# Altium PCB io9.PcbDoc
Units mm, origin at the board's own origin, x right, y up, seen from the top; angles counter-clockwise.
Board outline 240 x 140.7 mm, 2 copper layers (Top Layer, Bottom Layer); 27 components, 84 nets, 368 pads, 225 vias.
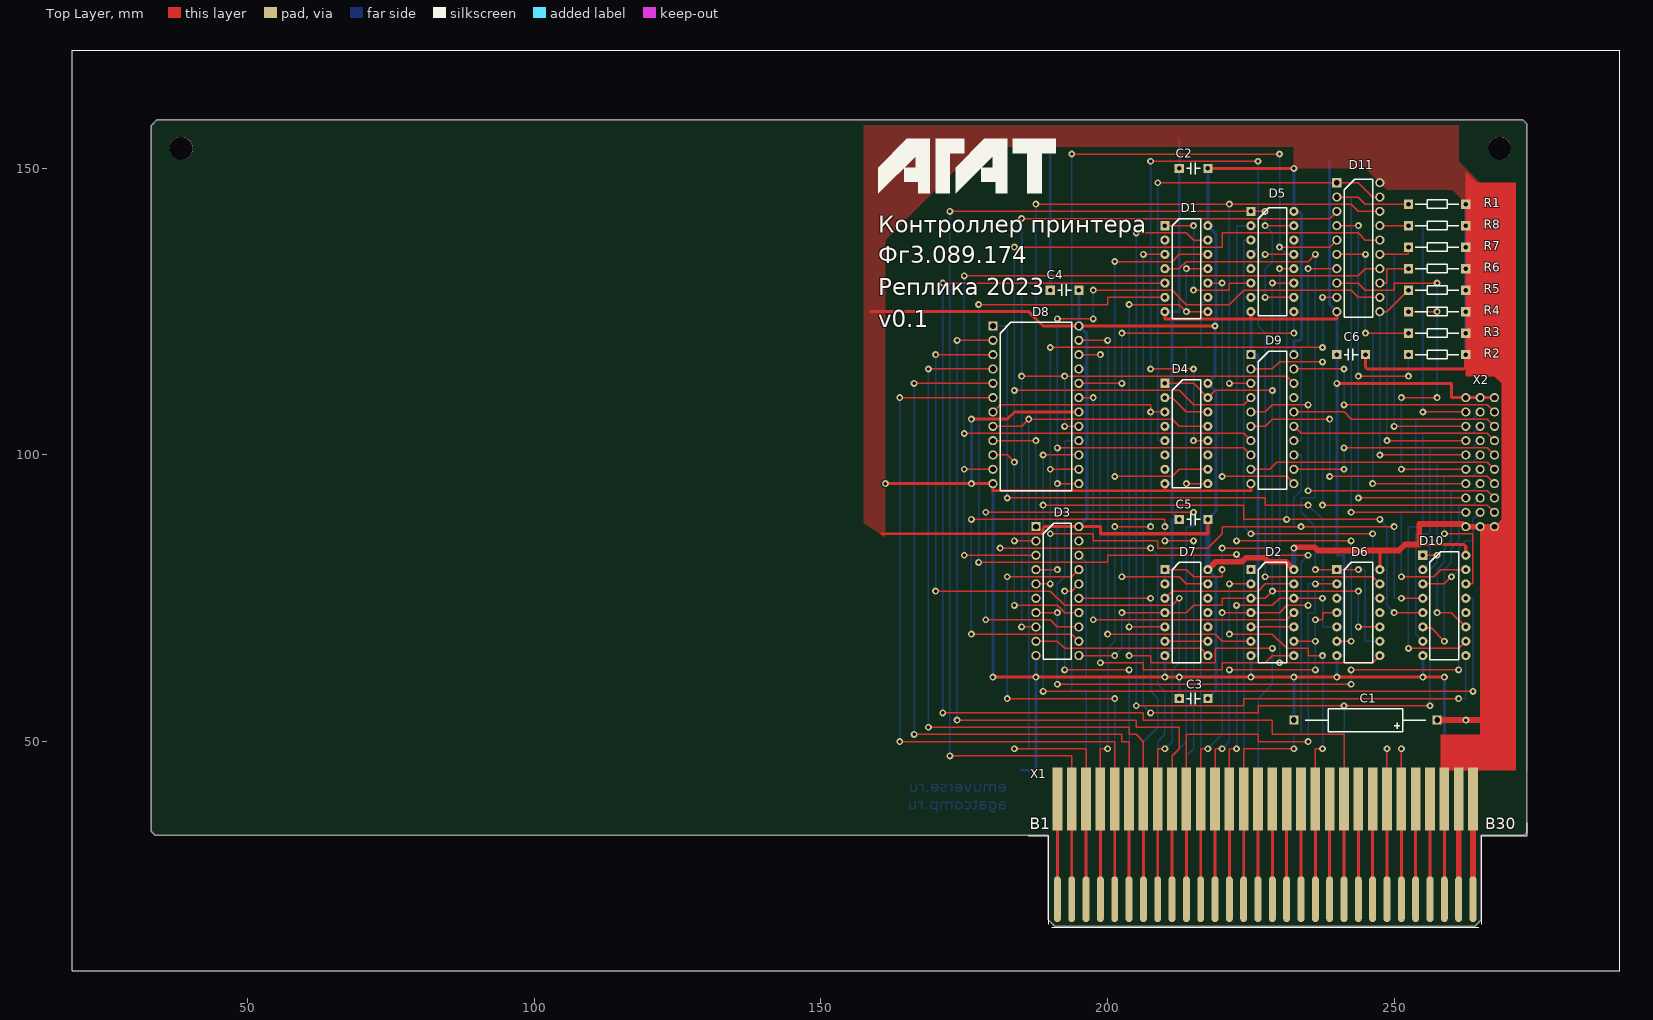
[diagram p0: Top Layer view]
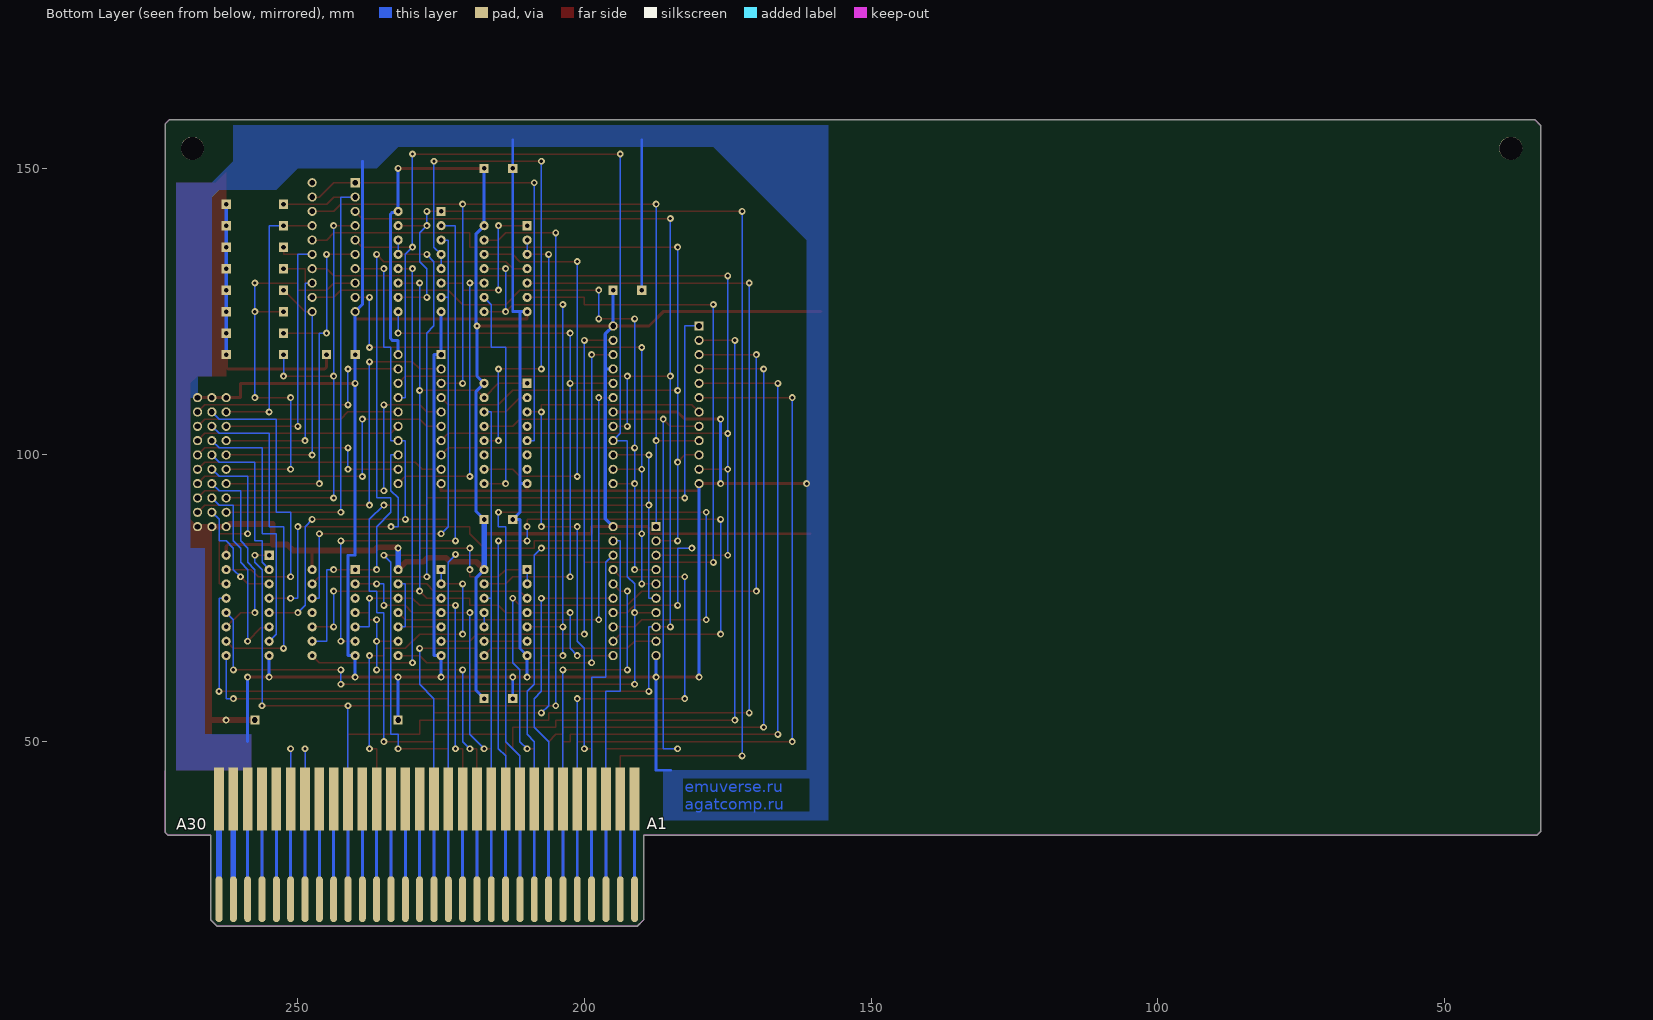
[diagram p1: Bottom Layer view, seen from below]

## Layer stack, top to bottom
Top Solder: solder mask 0.0102, Solder Resist, Dk 3.5
Top Layer: signal copper 0.0356
Dielectric 1: dielectric 0.32, FR-4, Dk 4.8
Bottom Layer: signal copper 0.0356
Bottom Solder: solder mask 0.0102, Solder Resist, Dk 3.5

## Board outline
189.7,18.9 189.7,33.6 189.675,33.625 33.875,33.625 33.15,34.35 33.15,157.45 34.2,158.5 272.4,158.5 273.15,157.75 273.15,34.15 272.625,33.625 265.2,33.625 265.2,18.9 264.1,17.8 190.8,17.8

## Design rules (kind name [scope] priority, off if disabled: settings)
Clearance [All] p1: gap=0.254 ignorepadtopadclearanceinfootprint=FALSE except(0: Arc-Hole Track-Hole SMDPad-Hole THPad-Hole Via-Hole Fill-Hole Poly-Hole Region-Hole Text-Hole; 0.2: Arc-Arc Arc-Track Arc-SMDPad Arc-THPad Arc-Via Arc-Fill Arc-Poly Arc-Region Arc-Text Track-Track Track-SMDPad Track-THPad Track-Via Track-Fill Track-Poly Track-Region Track-Text)
HoleSize [All] p1: absolutevalues=TRUE maxlimit=5 minlimit=0.025 maxpercent=80.000 minpercent=20.000
PolygonConnect [All] p1: connectstyle=Direct reliefconductorwidth=0.254 reliefentries=4 polygonreliefangle="90 Angle" airgapwidth=0.254
RoutingVias [All] p1: holewidth=0.711 width=1.27 viastyle="Through Hole" minholewidth=0.711 minwidth=1.27 maxholewidth=0.711 maxwidth=1.27
SolderMaskExpansion [All] p1: expansion=0.102 istentingtop=FALSE
Width [All] p1: maxlimit=2 minlimit=0.2 preferedwidth=0.25
29 further rules are at their usual default settings.

## Components (designator, comment, footprint, x,y, rotation, side; value= is the part's Value field where it differs from the comment)
C1 "0,1" CP30 257.5,53.75 r270 top
C2 "0,1 мкф" C5 212.5,150 r90 top
C3 "0,1 мкф" C5 212.5,57.5 r90 top
C4 "0,1 мкф" C5 190,128.75 r90 top
C5 "0,1 мкф" C5 212.5,88.75 r90 top
C6 "0,1 мкф" C5 240,117.5 r90 top
D1 "К555ЛЕ1" 201.14 210,140 r0 top
D2 "К555ЛЛ1" 201.14 225,80 r0 top
D3 "КР580ВА86" 2140.20 187.5,87.5 r0 top
D4 "К555ИД4" 201.16 210,112.5 r0 top
D5 "КР559ИП7" 201.16 225,142.5 r0 top
D6 "К555ЛИ6" 201.14 240,80 r0 top
D7 "К555ЛА3" 201.14 210,80 r0 top
D8 "К573РФ2" "2120.24 socket" 180,122.5 r0 top
D9 "К555ИР27" 201.20 225,117.5 r0 top
D10 "К555ТМ8" 201.16 255,82.5 r0 top
D11 "К555АП5" 201.20 240,147.5 r0 top
R1 "1K" R10 252.5,143.75 r90 top
R2 "1K" R10 252.5,117.5 r90 top
R3 "1K" R10 252.5,121.25 r90 top
R4 "1K" R10 252.5,125 r90 top
R5 "1K" R10 252.5,128.75 r90 top
R6 "1K" R10 252.5,132.5 r90 top
R7 "1K" R10 252.5,136.25 r90 top
R8 "1K" R10 252.5,140 r90 top
X1 "Agat-Ext-io9" AGAT_EXT 31.896,17.33 r0 top
X2 "IO9_OUT" СНП34-300/27х9,4Р-22-Р 267.5,87.5 r0 top

## Footprints (in the part's own frame and the unit in brackets; to place one, negate y for a bottom-side part, rotate by r counter-clockwise, add the part's x,y. Pads: shape width x height; smd on the part's side, far side on the other; paste and mask are expansions set on the pad)
201.14 [mm]
  rect 1.6x1.6 hole 0.8: 1(0,0)
  round 1.6 hole 0.8: 2(0,-2.5) 3(0,-5) 4(0,-7.5) 5(0,-10) 6(0,-12.5) 7(0,-15) 8(7.5,-15) 9(7.5,-12.5) 10(7.5,-10) 11(7.5,-7.5) 12(7.5,-5) 13(7.5,-2.5) 14(7.5,0)
  silkscreen extent 1.25,-16.25 6.25,1.25, body extent -0.13,-16.55 7.63,1.55, height 4.5
201.16 [mm]
  rect 1.6x1.6 hole 0.8: 1(0,0)
  round 1.6 hole 0.8: 2(0,-2.5) 3(0,-5) 4(0,-7.5) 5(0,-10) 6(0,-12.5) 7(0,-15) 8(0,-17.5) 9(7.5,-17.5) 10(7.5,-15) 11(7.5,-12.5) 12(7.5,-10) 13(7.5,-7.5) 14(7.5,-5) 15(7.5,-2.5) 16(7.5,0)
  silkscreen extent 1.25,-18.25 6.25,0.63, body extent -0.13,-19.05 7.63,1.55, height 4.5
201.20 [mm]
  rect 1.6x1.6 hole 1: 1(0,0)
  round 1.6 hole 1: 2(0,-2.5) 3(0,-5) 4(0,-7.5) 5(0,-10) 6(0,-12.5) 7(0,-15) 8(0,-17.5) 9(0,-20) 10(0,-22.5) 11(7.5,-22.5) 12(7.5,-20) 13(7.5,-17.5) 14(7.5,-15) 15(7.5,-12.5) 16(7.5,-10) 17(7.5,-7.5) 18(7.5,-5) 19(7.5,-2.5) 20(7.5,0)
  silkscreen extent 1.25,-23.5 6.25,0.63, body extent 0.02,-24.2 7.78,1.4, height 4.5
"2120.24 socket" [mm]
  rect 1.6x1.6 hole 1: 1(0,0)
  round 1.6 hole 1: 2(0,-2.5) 3(0,-5) 4(0,-7.5) 5(0,-10) 6(0,-12.5) 7(0,-15) 8(0,-17.5) 9(0,-20) 10(0,-22.5) 11(0,-25) 12(0,-27.5) 13(15,-27.5) 14(15,-25) 15(15,-22.5) 16(15,-20) 17(15,-17.5) 18(15,-15) 19(15,-12.5) 20(15,-10) 21(15,-7.5) 22(15,-5) 23(15,-2.5) 24(15,0)
  silkscreen extent 1.25,-28.75 13.75,0.63, body extent -1.39,-28.98 16.39,1.5, height 8.2
2140.20 [mm]
  rect 1.6x1.6 hole 1: 1(0,0)
  round 1.6 hole 1: 2(0,-2.5) 3(0,-5) 4(0,-7.5) 5(0,-10) 6(0,-12.5) 7(0,-15) 8(0,-17.5) 9(0,-20) 10(0,-22.5) 11(7.5,-22.5) 12(7.5,-20) 13(7.5,-17.5) 14(7.5,-15) 15(7.5,-12.5) 16(7.5,-10) 17(7.5,-7.5) 18(7.5,-5) 19(7.5,-2.5) 20(7.5,0)
  silkscreen extent 1.25,-23.1 6.2,0.63, body extent -0.1,-23.5 7.77,1.1, height 4.36
AGAT_EXT [mm]
  rrect100% 1.2x8 smd far side: A1(159.354,5.17) A2(161.854,5.17) A3(164.354,5.17) A4(166.854,5.17) A5(169.354,5.17) A6(171.854,5.17) A7(174.354,5.17) A8(176.854,5.17) A9(179.354,5.17) A10(181.854,5.17) A11(184.354,5.17) A12(186.854,5.17) A13(189.354,5.17) A14(191.854,5.17) A15(194.354,5.17) A16(196.854,5.17) A17(199.354,5.17) A18(201.854,5.17) A19(204.354,5.17) A20(206.854,5.17) A21(209.354,5.17) A22(211.854,5.17) A23(214.354,5.17) A24(216.854,5.17) A25(219.354,5.17) A26(221.854,5.17) A27(224.354,5.17) A28(226.854,5.17) A29(229.354,5.17) A30(231.854,5.17)
  rect 1.7x11 smd far side: A1(159.354,22.67) A2(161.854,22.67) A3(164.354,22.67) A4(166.854,22.67) A5(169.354,22.67) A6(171.854,22.67) A7(174.354,22.67) A8(176.854,22.67) A9(179.354,22.67) A10(181.854,22.67) A11(184.354,22.67) A12(186.854,22.67) A13(189.354,22.67) A14(191.854,22.67) A15(194.354,22.67) A16(196.854,22.67) A17(199.354,22.67) A18(201.854,22.67) A19(204.354,22.67) A20(206.854,22.67) A21(209.354,22.67) A22(211.854,22.67) A23(214.354,22.67) A24(216.854,22.67) A25(219.354,22.67) A26(221.854,22.67) A27(224.354,22.67) A28(226.854,22.67) A29(229.354,22.67) A30(231.854,22.67)
  rrect100% 1.2x8 smd: B1(159.354,5.17) B2(161.854,5.17) B3(164.354,5.17) B4(166.854,5.17) B5(169.354,5.17) B6(171.854,5.17) B7(174.354,5.17) B8(176.854,5.17) B9(179.354,5.17) B10(181.854,5.17) B11(184.354,5.17) B12(186.854,5.17) B13(189.354,5.17) B14(191.854,5.17) B15(194.354,5.17) B16(196.854,5.17) B17(199.354,5.17) B18(201.854,5.17) B19(204.354,5.17) B20(206.854,5.17) B21(209.354,5.17) B22(211.854,5.17) B23(214.354,5.17) B24(216.854,5.17) B25(219.354,5.17) B26(221.854,5.17) B27(224.354,5.17) B28(226.854,5.17) B29(229.354,5.17) B30(231.854,5.17)
  rect 1.7x11 smd: B1(159.354,22.67) B2(161.854,22.67) B3(164.354,22.67) B4(166.854,22.67) B5(169.354,22.67) B6(171.854,22.67) B7(174.354,22.67) B8(176.854,22.67) B9(179.354,22.67) B10(181.854,22.67) B11(184.354,22.67) B12(186.854,22.67) B13(189.354,22.67) B14(191.854,22.67) B15(194.354,22.67) B16(196.854,22.67) B17(199.354,22.67) B18(201.854,22.67) B19(204.354,22.67) B20(206.854,22.67) B21(209.354,22.67) B22(211.854,22.67) B23(214.354,22.67) B24(216.854,22.67) B25(219.354,22.67) B26(221.854,22.67) B27(224.354,22.67) B28(226.854,22.67) B29(229.354,22.67) B30(231.854,22.67)
  Top Layer lines w0.5: 159.354,8.97 159.354,18 ; 161.854,8.77 161.854,18 ; 164.354,8.87 164.354,18 ; 166.5,18 166.854,17.646 166.854,8.77 ; 169.354,8.77 169.354,18 ; 171.854,8.97 171.854,17.5 ; 174.354,8.87 174.354,17.5 ; 176.854,8.77 176.854,17.5 ; 179.354,9.27 179.354,17.5 ; 181.854,8.97 181.854,17.5 ; 184.354,9.07 184.354,17.5 ; 186.854,8.77 186.854,17.5 ; 189.354,8.77 189.354,17.5 ; 191.854,8.77 191.854,17.5 ; 194.354,8.77 194.354,17.5 ; 196.854,8.77 196.854,17.5 ; 199.354,8.77 199.354,17.5 ; 201.854,8.77 201.854,17.5 ; 204.354,8.77 204.354,17.5 ; 206.854,8.77 206.854,17.5 ; 209.354,8.77 209.354,17.5 ; 211.854,8.87 211.854,17.5 ; 214.354,8.77 214.354,17.5 ; 216.854,8.97 216.854,17.5 ; 219.354,8.77 219.354,17.5 ; 221.854,8.77 221.854,17.5 ; 224.354,8.87 224.354,17.5 ; 226.854,8.77 226.854,17.5
  Top Layer lines w1: 229.354,8.77 229.354,17.5 ; 231.854,8.77 231.854,17.5
  Bottom Layer lines w0.5: 159.354,8.97 159.354,17.5 ; 161.854,8.77 161.854,17.5 ; 164.354,8.97 164.354,18 ; 166.854,8.77 166.854,17.5 ; 169.354,8.77 169.354,17.5 ; 171.854,8.87 171.854,18 ; 174.354,8.97 174.354,17.5 ; 176.854,8.77 176.854,17.5 ; 179.354,9.07 179.354,17.5 ; 181.854,9.17 181.854,17.5 ; 184.354,8.87 184.354,18 ; 186.854,8.77 186.854,17.5 ; 189.354,8.77 189.354,18 ; 191.854,8.77 191.854,17.5 ; 194.354,8.77 194.354,17.5 ; 196.854,8.77 196.854,18 ; 199.354,8.77 199.354,18 ; 201.854,8.77 201.854,18 ; 204.354,8.77 204.354,17.5 ; 206.854,8.77 206.854,17.5 ; 209.354,8.77 209.354,17.5 ; 211.854,8.87 211.854,18 ; 214.354,8.77 214.354,17.5 ; 216.854,8.87 216.854,17.5 ; 219.354,8.77 219.354,17.5 ; 221.854,8.77 221.854,17.5 ; 224.354,8.87 224.354,18 ; 226.854,8.77 226.854,17.5
  Bottom Layer lines w1: 229.354,8.77 229.354,18 ; 231.854,8.77 231.854,17.5
  silkscreen extent 154.27,0.27 241.3,18.5
C5 [mm]
  rect 1.6x1.6 hole 0.8: 1(0,0) 2(0,-5)
  silkscreen extent -1,-3.7 1,-1.3, body extent -1.05,-5.54 1.05,0.46, height 8.1
CP30 [mm]
  rect 1.6x1.6 hole 1: 1(0,0) 2(0,-25)
  silkscreen extent -2,-23 2,-2, body extent -2.56,-25.42 2.56,0.42, height 5.86
R10 [mm]
  rect 1.6x1.6 hole 0.8: 1(0,0) 2(0,-10)
  silkscreen extent -0.75,-8.8 0.75,-1.2, body extent -1.2,-10.38 1.18,0.38, height 2.41
СНП34-300/27х9,4Р-22-Р [mm]
  round 1.6 hole 1: A1(0,0) A2(0,2.5) A3(0,5) A4(0,7.5) A5(0,10) A6(0,12.5) A7(0,15) A8(0,17.5) A9(0,20) A10(0,22.5) B1(-2.5,0) B2(-2.5,2.5) B3(-2.5,5) B4(-2.5,7.5) B5(-2.5,10) B6(-2.5,12.5) B7(-2.5,15) B8(-2.5,17.5) B9(-2.5,20) B10(-2.5,22.5) C1(-5,0) C2(-5,2.5) C3(-5,5) C4(-5,7.5) C5(-5,10) C6(-5,12.5) C7(-5,15) C8(-5,17.5) C9(-5,20) C10(-5,22.5)
  body extent -5.15,-2.3 14,24.7, height 9.7

## Part data
C1: library part К53-14, "К53-14"
C2 C3 C4 C5 C6: library part К10-17, "К10-17"
D1 D2 D5 D6: ManufacturerPartNumber=К555ЛА3
R1 R2 R3 R4 R5 R6 R7 R8: library part С2-23, "Резистор"
D4: ManufacturerPartNumber=К555ИД4
D7: ManufacturerPartNumber=К555ЛА3
D10: ManufacturerPartNumber=К555ТМ8

## Free pads (board coordinates)
  round 4 hole 4 unplated: 0(38.4,153.5) 0(268.4,153.5)

## Via types
v1: diameter 1.2, hole 0.6, Top Layer to Bottom Layer, 225 vias

## Nets (pads, with @x,y where several pads share a name; then routed paths per layer and width w, separated by ;. In a path a pad name is that pad's centre, name@x,y a point inside that pad or via, vN(x,y) a via of type N, cw(c..) or ccw(c..) an arc to the next point about the centre after c; other vN are vias at no path point)
2M: D1.8 D1.11 D7.5 X1.A15 | length 144.1
  Top Layer w0.25: v1(203.75,65) 207.5,65 207.5,63.75 218.75,63.75 218.75,66.25 v1(228.75,66.25) ; v1(203.75,70) D7.5 ; v1(203.75,126.25) 212.5,126.25 v1(213.75,125) D1.8 ; v1(213.75,132.5) D1.11
  Bottom Layer w0.25: v1(203.75,65) v1(203.75,126.25) ; v1(213.75,125) v1(213.75,132.5) ; X1.A15@226.25,45 226.25,57.5 228.75,60 v1(228.75,66.25)
+5В: C1.1 C2.2 C3.2 C4.2 C5.2 C6.2 D1.14 D2.14 D3.20 D4.16 D5.16 D6.14 D7.14 D8.21 D8.24 D9.20 D10.16 D11.20 R1.2 R2.2 R3.2 R4.2 R5.2 R6.2 R7.2 R8.2 X1.B28 X1.B29 X1.B30 X2.A1 X2.B1 X2.C1 | length 442.1
  Top Layer w0.5: 160.625,86.25 188.486,86.25 188.75,86.514 188.75,87.207 189.043,87.5 D3.20
  Top Layer w0.55: 158.75,125 186.25,125 188.75,122.5 190,122.5 D8.24 v1(218.75,122.5) ; D3.20 198.75,87.5 198.75,86.25 217.5,86.25 C5.2 ; C2.2 v1(232.5,150) ; C6.2 245,115.322 245.322,115 262.178,115 262.5,115.322 R2.2 ; D6.14 247.5,83.125 ; 254.375,84.375 262.178,84.375 262.5,84.053 D10.16
  Top Layer w1: D7.14 218.866,81.366 223.468,81.366 224.161,82.059 227.374,82.059 228.067,81.366 231.134,81.366 D2.14 ; v1(232.5,83.75) 232.554,83.75 232.717,83.912 236.088,83.912 236.683,83.317 250.817,83.317 251.875,84.375 254.375,84.375 254.375,87.948 261.89,87.948 262.338,87.5 X2.C1 X2.B1 X2.A1 ; C1.1 v1(262.5,53.75) 266.25,53.75
  Bottom Layer w0.55: D3.20 196.368,88.868 196.368,115 ; D8.21 196.368,115 ; C4.2 D8.24 196.368,121.132 196.368,115 ; C3.2 218.909,58.909 218.909,78.591 D7.14 ; C5.2 218.899,90.149 218.899,111.101 D4.16 218.75,113.75 v1(218.75,122.5) 218.874,122.624 218.874,123.084 218.902,123.111 218.902,138.598 D1.14 C2.2 ; D9.20 232.5,120 233.521,120 233.843,120.322 233.843,142.001 233.521,142.323 232.677,142.323 D5.16 v1(232.5,150) ; R2.2 R3.2 R1.2
  Bottom Layer w1: D7.14 C5.2 ; D2.14 v1(232.5,83.75)
A0: D4.13 D8.8 X1.B3 | length 114.8
  Top Layer w0.25: D8.8 185,105 v1(186.25,106.25) 211.25,106.25 212.5,105 D4.13 ; v1(183.75,48.75) 196.25,48.75 X1.B3@196.25,45
  Bottom Layer w0.25: v1(183.75,48.75) 186.25,48.75 v1(186.25,106.25)
A1: D4.3 D8.7 X1.B4 | length 102.3
  Top Layer w0.25: D8.7 181.25,108.75 207.5,108.75 v1(207.5,107.5) D4.3 ; X1.B4@198.75,45 198.75,48.75 v1(200,48.75) ; v1(201.25,87.5) v1(207.5,87.5)
  Bottom Layer w0.25: v1(200,48.75) 200,66.25 201.25,67.5 v1(201.25,87.5) ; v1(207.5,87.5) v1(207.5,107.5)
A2: D8.6 X1.B5 | length 118.7
  Top Layer w0.25: v1(163.75,50) 201.25,50 X1.B5@201.25,45 ; v1(163.75,110) D8.6
  Bottom Layer w0.25: v1(163.75,50) v1(163.75,110)
A3: D8.5 X1.B6 | length 118.7
  Top Layer w0.25: v1(166.25,51.25) 202.5,51.25 202.5,50 203.75,50 X1.B6@203.75,45 ; v1(166.25,112.5) D8.5
  Bottom Layer w0.25: v1(166.25,51.25) v1(166.25,112.5)
A4: D8.4 X1.B7 | length 118
  Top Layer w0.25: v1(168.75,52.5) 203.75,52.5 203.75,51.25 205,51.25 206.25,50 X1.B7@206.25,45 ; v1(168.75,115) D8.4
  Bottom Layer w0.25: v1(168.75,52.5) v1(168.75,115)
A5: D8.3 X1.B8 | length 127.6
  Top Layer w0.25: v1(170,76.25) 190,76.25 192.5,73.75 211.25,73.75 v1(212.5,75) ; v1(170,117.5) D8.3 ; X1.B8@208.75,45 208.75,48.75 v1(210,48.75)
  Bottom Layer w0.25: v1(170,76.25) v1(170,117.5) ; v1(210,48.75) 211.25,50 211.25,62.5 212.5,63.75 v1(212.5,75)
A6: D8.2 X1.B9 | length 120.5
  Top Layer w0.25: v1(173.75,53.75) 205,53.75 205,52.5 212.5,52.5 212.5,48.75 211.25,47.5 X1.B9@211.25,45 ; v1(173.75,120) D8.2
  Bottom Layer w0.25: v1(173.75,53.75) v1(173.75,120)
A7: D8.1 X1.B10 | length 159.8
  Top Layer w0.25: v1(182.5,92.5) 227.5,92.5 227.5,91.25 v1(235,91.25) ; X1.B10@213.75,45 213.75,51.25 226.25,51.25 226.25,50 v1(235,50)
  Bottom Layer w0.25: D8.1 182.5,122.5 v1(182.5,92.5) ; v1(235,50) 235,72.5 236.25,72.5 236.25,76.25 237.5,76.25 237.5,88.75 v1(235,91.25)
A8: D2.4 D6.2 X1.B11 | length 54.1
  Top Layer w0.25: X1.B11@216.25,45 216.25,48.75 v1(217.5,48.75) ; v1(220,72.5) D2.4 230,72.5 231.25,73.75 v1(235,73.75) ; v1(236.25,77.5) D6.2
  Bottom Layer w0.25: v1(217.5,48.75) 220,51.25 v1(220,72.5) ; v1(235,73.75) 235,77.5 v1(236.25,77.5)
A9: D2.9 D6.4 X1.B12 | length 51.8
  Top Layer w0.25: X1.B12@218.75,45 218.75,48.75 v1(220,48.75) ; v1(221.25,62.5) v1(236.25,62.5) ; D2.9 v1(236.25,67.5) ; v1(236.25,71.25) 237.5,71.25 237.5,72.5 D6.4
  Bottom Layer w0.25: v1(220,48.75) 221.25,50 v1(221.25,62.5) ; v1(236.25,62.5) v1(236.25,71.25)
A10: D2.12 D6.5 X1.B13 | length 53
  Top Layer w0.25: X1.B13@221.25,45 221.25,48.75 v1(222.5,48.75) ; v1(222.5,73.75) 228.75,73.75 230,75 D2.12 v1(237.5,75)
  Bottom Layer w0.25: v1(222.5,48.75) v1(222.5,73.75) ; v1(237.5,75) 237.5,70 D6.5
A11: D7.1 D7.2 X1.B14 | length 82.3
  Top Layer w0.25: D7.1 213.75,80 215,78.75 220,78.75 v1(220,80) ; v1(220,83.75) 228.75,83.75 228.75,82.5 v1(235,82.5) ; X1.B14@223.75,45 223.75,48.75 v1(232.5,48.75)
  Bottom Layer w0.25: D7.2 D7.1 ; v1(220,80) v1(220,83.75) ; v1(232.5,48.75) 232.5,51.25 233.75,51.25 233.75,81.25 v1(235,82.5)
BD0: D3.19 X1.A3 | length 43.8
  Bottom Layer w0.25: D3.19 193.75,85 193.75,58.75 196.25,58.75 X1.A3@196.25,45
BD1: D3.18 X1.A4 | length 40.5
  Bottom Layer w0.25: D3.18 196.25,81.25 196.25,61.25 198.75,61.25 X1.A4@198.75,45
BD2: D3.17 X1.A5 | length 65.5
  Top Layer w0.25: v1(182.5,57.5) v1(201.25,57.5) ; v1(182.5,78.75) 193.75,78.75 D3.17
  Bottom Layer w0.25: v1(182.5,57.5) v1(182.5,78.75) ; X1.A5@201.25,45 v1(201.25,57.5)
BD3: D3.16 X1.A6 | length 45.5
  Top Layer w0.25: v1(192.5,62.5) v1(203.75,62.5) ; v1(192.5,76.25) 193.75,76.25 D3.16
  Bottom Layer w0.25: v1(192.5,62.5) v1(192.5,76.25) ; X1.A6@203.75,45 v1(203.75,62.5)
BD4: D3.15 X1.A7 | length 44.1
  Top Layer w0.25: D3.15 v1(207.5,75)
  Bottom Layer w0.25: X1.A7@206.25,45 206.25,50 208.75,52.5 208.75,57.5 207.5,58.75 v1(207.5,75)
BD5: D3.14 X1.A8 | length 90.8
  Top Layer w0.25: v1(181.25,83.75) v1(207.5,83.75) ; v1(183.75,73.75) 191.25,73.75 191.575,73.425 191.633,73.425 192.558,72.5 D3.14
  Bottom Layer w0.25: v1(181.25,83.75) 183.75,83.75 v1(183.75,73.75) ; v1(207.5,83.75) 208.75,82.5 208.75,60 210,58.75 210,51.25 208.75,50 X1.A8@208.75,45
BD6: D3.13 X1.A9 | length 119.1
  Top Layer w0.25: v1(178.75,71.25) 190,71.25 191.25,70 D3.13 ; v1(178.75,90) v1(215,90)
  Bottom Layer w0.25: v1(178.75,71.25) v1(178.75,90) ; X1.A9@211.25,45 211.25,47.5 213.75,50 213.75,87.5 215,87.5 v1(215,90)
BD7: D3.12 X1.A10 | length 122.3
  Top Layer w0.25: v1(176.25,68.75) 193.75,68.75 D3.12 ; v1(176.25,88.75) 210,88.75 v1(210,87.5) ; v1(210,85) v1(215,85)
  Bottom Layer w0.25: v1(176.25,68.75) v1(176.25,88.75) ; v1(210,85) v1(210,87.5) ; X1.A10@213.75,45 213.75,47.5 215,48.75 v1(215,85)
BRW: D2.1 D2.2 X1.B19 | length 56
  Top Layer w0.25: v1(221.25,68.75) 228.75,68.75 231.25,66.25 235,66.25 235,65 v1(237.5,65) ; v1(221.25,77.5) D2.2 ; X1.B19@236.25,43.75 236.25,48.75 v1(237.5,48.75)
  Bottom Layer w0.25: v1(221.25,68.75) v1(221.25,77.5) ; D2.2 D2.1 ; v1(237.5,48.75) v1(237.5,65)
CT1: D11.2 R1.1 X2.C2 | length 90.5
  Top Layer w0.25: D11.2 243.75,145 245,143.75 R1.1 ; v1(242.5,90) X2.C2
  Bottom Layer w0.25: D11.2 242.5,145 v1(242.5,90)
CT2: D11.4 R2.1 X2.C3 | length 82.5
  Top Layer w0.25: D11.4 v1(243.75,140) ; v1(243.75,92.5) X2.C3 ; v1(243.75,113.75) v1(252.5,113.75)
  Bottom Layer w0.25: v1(243.75,92.5) v1(243.75,113.75) v1(243.75,140) ; v1(252.5,113.75) R2.1
CT3: D11.6 R3.1 X2.C4 | length 70
  Top Layer w0.25: D11.6 v1(245,135) ; v1(245,121.25) R3.1 ; v1(246.25,95) X2.C4
  Bottom Layer w0.25: v1(245,135) v1(245,121.25) 246.25,121.25 v1(246.25,95)
CT4: D11.8 R4.1 X2.C5 | length 74.3
  Top Layer w0.25: D11.8 243.75,130 245,128.75 250,128.75 250,130 v1(257.5,130) ; v1(251.25,97.5) X2.C5 ; v1(251.25,110) v1(257.5,110) ; R4.1 v1(257.5,125)
  Bottom Layer w0.25: v1(251.25,97.5) v1(251.25,110) ; v1(257.5,110) v1(257.5,130)
CT5: D11.11 R5.1 X2.C6 | length 46.6
  Top Layer w0.25: v1(247.5,100) X2.C6 ; D11.11 248.75,125 R5.1
  Bottom Layer w0.25: v1(247.5,100) D11.11
CT6: D11.13 R6.1 X2.C7 | length 50
  Top Layer w0.25: D11.13 248.75,130 248.75,132.5 R6.1 ; v1(248.75,102.5) X2.C7
  Bottom Layer w0.25: D11.13 248.75,130 v1(248.75,102.5)
CT7: D11.15 R7.1 X2.C8 | length 51.3
  Top Layer w0.25: D11.15 252.5,135 R7.1 ; v1(250,105) X2.C8
  Bottom Layer w0.25: D11.15 250,135 v1(250,105)
CT8: D11.17 R8.1 X2.C9 | length 47.5
  Top Layer w0.25: D11.17 R8.1 ; v1(255,107.5) X2.C9
  Bottom Layer w0.25: R8.1 255,140 v1(255,107.5)
D0: D3.1 D8.9 D9.3 D11.18 | length 159.3
  Top Layer w0.25: D8.9 v1(187.5,102.5) ; v1(187.5,143.75) v1(221.25,143.75) 242.5,143.75 243.75,142.5 D11.18 ; v1(221.25,112.5) D9.3
  Bottom Layer w0.25: D3.1 v1(187.5,102.5) v1(187.5,143.75) ; v1(221.25,112.5) v1(221.25,143.75)
D1: D3.2 D8.10 D9.4 D11.16 | length 168.8
  Top Layer w0.25: D8.10 182.5,100 v1(183.75,98.75) ; v1(183.75,85) D3.2 ; v1(183.75,111.25) 212.5,111.25 215,108.75 223.75,108.75 D9.4 ; v1(183.75,136.25) 220,136.25 220,138.75 243.75,138.75 245,137.5 D11.16
  Bottom Layer w0.25: v1(183.75,85) v1(183.75,98.75) v1(183.75,111.25) v1(183.75,136.25)
D2: D3.3 D8.11 D9.7 D11.14 | length 189.8
  Top Layer w0.25: v1(175,82.5) D3.3 ; v1(175,97.5) D8.11 ; v1(175,103.75) 223.75,103.75 D9.7 ; v1(175,131.25) 243.75,131.25 245,132.5 D11.14
  Bottom Layer w0.25: v1(175,82.5) v1(175,131.25)
D3: D3.4 D8.13 D9.8 D11.12 | length 149.4
  Top Layer w0.25: D3.4 v1(191.25,80) ; v1(191.25,95) D8.13 ; v1(191.25,101.25) 223.75,101.25 D9.8 ; v1(191.25,123.75) v1(197.5,123.75) ; v1(197.5,128.75) 211.25,128.75 213.75,126.25 221.25,126.25 223.75,128.75 242.5,128.75 243.75,127.5 D11.12
  Bottom Layer w0.25: v1(191.25,80) v1(191.25,95) v1(191.25,101.25) v1(191.25,123.75) ; v1(197.5,123.75) v1(197.5,128.75)
D4: D3.5 D8.14 D9.13 D10.4 D11.9 | length 205.3
  Top Layer w0.25: D3.5 v1(190,77.5) ; v1(190,86.25) 197.5,86.25 197.5,85 208.75,85 208.75,83.75 217.5,83.75 220,86.25 220,87.5 v1(250,87.5) ; v1(190,97.5) D8.14 ; v1(190,118.75) v1(237.5,118.75) ; v1(237.5,127.5) D11.9 ; v1(251.25,75) D10.4
  Bottom Layer w0.25: v1(190,77.5) v1(190,86.25) v1(190,97.5) v1(190,118.75) ; D9.13 233.75,100 233.75,93.75 232.5,92.5 232.5,87.5 v1(233.75,87.5) ; v1(237.5,118.75) v1(237.5,127.5) ; v1(250,87.5) 250,75 v1(251.25,75)
D5: D3.6 D8.15 D9.14 D10.5 D11.7 | length 168.5
  Top Layer w0.25: v1(188.75,91.25) 223.75,91.25 223.75,88.75 v1(231.25,88.75) v1(247.5,88.75) ; v1(188.75,100) D8.15 ; v1(235,132.5) D11.7 ; v1(250,72.5) D10.5
  Bottom Layer w0.25: D3.6 188.75,75 v1(188.75,91.25) v1(188.75,100) ; v1(231.25,88.75) 231.25,102.5 233.75,102.5 233.75,118.75 235,118.75 v1(235,132.5) ; v1(247.5,88.75) 248.75,87.5 248.75,73.75 v1(250,72.5)
D6: D3.7 D8.16 D9.17 D10.12 D11.5 | length 273.8
  Top Layer w0.25: D3.7 v1(191.25,72.5) ; v1(191.25,60) v1(242.5,60) ; v1(193.75,152.5) v1(230,152.5) ; v1(230,136.25) 238.75,136.25 D11.5 ; v1(242.5,62.5) v1(261.25,62.5)
  Bottom Layer w0.25: v1(191.25,60) v1(191.25,72.5) 191.25,77.5 192.5,78.75 192.5,102.5 D8.16 193.75,103.75 v1(193.75,152.5) ; v1(230,152.5) v1(230,136.25) 231.25,135 231.25,110 D9.17 ; v1(242.5,60) v1(242.5,62.5) ; v1(261.25,62.5) 261.25,71.25 D10.12
D7: D3.8 D8.17 D9.18 D10.13 D11.3 | length 293.5
  Top Layer w0.25: v1(185,70) D3.8 ; v1(185,113.75) v1(192.5,113.75) 231.25,113.75 D9.18 ; v1(185,141.25) 238.75,141.25 D11.3 ; v1(188.75,58.75) v1(263.75,58.75) ; v1(192.5,105) D8.17
  Bottom Layer w0.25: v1(185,70) v1(185,113.75) v1(185,141.25) ; D3.8 188.75,70 v1(188.75,58.75) ; v1(192.5,105) v1(192.5,113.75) ; D10.13 263.75,75 v1(263.75,58.75)
DS#: D4.2 D4.14 D7.12 X1.A11 | length 73.5
  Top Layer w0.25: D4.2 211.25,110 213.75,107.5 D4.14
  Bottom Layer w0.25: X1.A11@216.25,45 216.25,75 ; D7.12 216.25,75 ; D4.14 216.25,107.5 216.25,75
GND: C1.2 C2.1 C3.1 C4.1 C5.1 C6.1 D1.7 D2.7 D3.10 D4.8 D5.8 D6.7 D7.7 D8.12 D8.18 D9.1 D9.10 D10.8 D11.10 X1.A28 X1.A29 X1.A30 X2.A10 X2.B10 X2.C10 | length 608.3
  Top Layer w0.5: v1(161.25,95) D8.12 180,93.75 210,93.75 ; v1(176.25,106.25) 182.5,106.25 183.75,107.5 D8.18 ; v1(180,61.25) v1(187.5,61.25) v1(210,61.25) v1(212.5,61.25) v1(225,61.25) v1(258.75,61.25) ; D4.8 210,93.75 ; D1.7 210,123.75 240,123.75 D11.10 ; D9.10 225,93.75 210,93.75 ; 225,123.75 D5.8 ; v1(240,112.5) 260,112.5 260,110 X2.C10 X2.B10 X2.A10
  Bottom Layer w0.5: v1(176.25,95) v1(176.25,106.25) ; v1(180,61.25) D8.12 ; 185,45 187.5,45 D3.10 ; C4.1 190,155 ; v1(210,61.25) D7.7 211.25,66.25 211.25,88.75 C5.1 211.25,90 211.25,95 ; D4.8 211.25,95 ; D1.7 212.5,125 212.5,155 ; 211.25,125 211.25,95 ; C3.1 v1(212.5,61.25) ; v1(225,61.25) D2.7 226.25,65 226.25,117.5 D9.1 D5.8 ; C1.2 v1(232.5,61.25) ; 238.75,151.25 238.75,126.25 D11.10 C6.1 v1(240,112.5) 240,82.5 241.25,82.5 241.25,65 D6.7 v1(240,61.25) ; v1(255,61.25) D10.8 ; 258.75,50 v1(258.75,61.25)
NetD1_1: D1.1 D5.6 | length 27.5
  Top Layer w0.25: D1.1 v1(215,140) ; v1(215,128.75) 221.25,128.75 221.25,130 D5.6
  Bottom Layer w0.25: v1(215,128.75) v1(215,140)
NetD1_4: D1.4 D6.1 D6.9 | length 109.6
  Top Layer w0.25: D1.4 212.442,132.5 213.692,133.75 235,133.75 v1(236.25,135) ; v1(236.25,80) D6.1 v1(243.75,80)
  Bottom Layer w0.25: v1(236.25,80) 236.25,87.5 233.75,90 233.75,92.5 236.25,92.5 v1(236.25,135) ; v1(243.75,80) 245,80 245,67.5 D6.9
NetD1_9: D1.9 D4.9 | length 39.3
  Top Layer w0.25: v1(213.75,95) D4.9
  Bottom Layer w0.25: v1(213.75,95) 213.75,118.75 216.25,118.75 216.25,126.25 D1.9
NetD1_10: D1.10 D9.11 | length 49.3
  Top Layer w0.25: D1.10 v1(220,130) ; v1(220,96.25) 231.25,96.25 D9.11
  Bottom Layer w0.25: v1(220,96.25) v1(220,130)
NetD1_12: D1.12 D4.10 | length 71
  Top Layer w0.25: v1(201.25,96.25) 211.25,96.25 212.5,97.5 D4.10 ; v1(201.25,133.75) 211.25,133.75 212.5,135 D1.12
  Bottom Layer w0.25: v1(201.25,96.25) v1(201.25,133.75)
NetD1_13: D1.13 D10.9 | length 161.8
  Top Layer w0.25: v1(205,56.25) 223.75,56.25 223.75,57.5 v1(261.25,57.5) ; v1(205,138.75) 213.75,138.75 215,137.5 D1.13
  Bottom Layer w0.25: v1(205,56.25) v1(205,138.75) ; v1(261.25,57.5) 262.5,57.5 D10.9
NetD2_5: D2.5 D2.10 D2.13 D7.3 | length 41
  Top Layer w0.25: D7.3 211.25,76.25 226.25,76.25 227.5,77.5 D2.13 ; D2.5 D2.10
  Bottom Layer w0.25: D2.10 231.25,70 231.25,77.5 D2.13
NetD2_6: D2.6 D8.23 | length 81.8
  Top Layer w0.25: D8.23 v1(200,120) ; v1(200,68.75) 218.75,68.75 220,67.5 D2.6
  Bottom Layer w0.25: v1(200,68.75) v1(200,120)
NetD2_8: D2.8 D8.22 | length 94.3
  Top Layer w0.25: D8.22 v1(198.75,117.5) ; v1(198.75,63.75) 206.25,63.75 206.25,62.5 220,62.5 220,63.75 227.5,63.75 228.75,65 D2.8
  Bottom Layer w0.25: v1(198.75,63.75) v1(198.75,117.5)
NetD2_11: D2.11 D8.19 | length 76.8
  Top Layer w0.25: D8.19 v1(197.5,110) ; v1(197.5,71.25) 231.25,71.25 D2.11
  Bottom Layer w0.25: v1(197.5,71.25) v1(197.5,110)
NetD3_9: D3.9 D7.8 | length 31
  Top Layer w0.25: D3.9 191.25,67.5 192.5,66.25 216.25,66.25 D7.8
NetD4_5: D4.5 D11.1 D11.19 | length 86
  Top Layer w0.25: v1(208.75,147.5) D11.1 243.75,147.5 246.25,145 D11.19
  Bottom Layer w0.25: v1(208.75,147.5) 208.75,102.5 D4.5
NetD4_12: D4.12 D5.4 D5.5 | length 96.8
  Top Layer w0.25: v1(207.5,115) v1(215,115) ; v1(207.5,151.25) v1(226.25,151.25) ; v1(215,102.5) D4.12
  Bottom Layer w0.25: v1(207.5,115) v1(207.5,151.25) ; v1(215,102.5) v1(215,115) ; D5.5 D5.4 226.25,136.25 v1(226.25,151.25)
NetD5_2: D5.2 D6.6 | length 97.5
  Top Layer w0.25: v1(222.5,85) v1(242.5,85) ; D6.6 v1(242.5,67.5)
  Bottom Layer w0.25: v1(222.5,85) 222.5,140 D5.2 ; v1(242.5,67.5) v1(242.5,85)
NetD5_3: D5.3 D5.7 D6.12 | length 89.3
  Top Layer w0.25: v1(225,86.25) v1(246.25,86.25)
  Bottom Layer w0.25: v1(225,86.25) 223.75,87.5 223.75,127.5 ; D5.3 223.75,137.5 223.75,127.5 ; v1(246.25,86.25) 246.25,75 D6.12 ; 223.75,127.5 D5.7 223.75,127.5
NetD5_9: D5.9 D7.13 D8.20 | length 99.3
  Top Layer w0.25: D8.20 v1(202.5,112.5) ; v1(202.5,78.75) 212.5,78.75 213.75,77.5 D7.13 ; v1(202.5,121.25) v1(232.5,121.25)
  Bottom Layer w0.25: v1(202.5,78.75) v1(202.5,121.25) ; v1(232.5,121.25) D5.9
NetD5_12: D5.12 D6.8 | length 89.3
  Top Layer w0.25: v1(230,63.75) 246.25,63.75 D6.8 ; v1(230,132.5) D5.12
  Bottom Layer w0.25: v1(230,63.75) v1(230,132.5)
NetD5_13: D5.13 D5.14 D6.13 | length 85.3
  Top Layer w0.25: v1(227.5,78.75) 246.25,78.75 D6.13 ; v1(227.5,135) D5.13
  Bottom Layer w0.25: v1(227.5,78.75) 227.5,121.25 226.25,122.5 226.25,133.75 v1(227.5,135) ; D5.13 D5.14
NetD7_6: D7.6 D7.9 | length 7.5
  Top Layer w0.25: D7.6 D7.9
NetD7_10: D7.10 D7.11 | length 2.5
  Bottom Layer w0.25: D7.10 D7.11
NetX1_A24: X1.A24 X1.B24 | length 7.5
  Top Layer w0.25: X1.B24@248.75,45 v1(248.75,48.75)
  Bottom Layer w0.25: X1.A24@248.75,45 v1(248.75,48.75)
NetX1_A25: X1.A25 X1.B25 | length 7.5
  Top Layer w0.25: X1.B25@251.25,45 v1(251.25,48.75)
  Bottom Layer w0.25: X1.A25@251.25,45 v1(251.25,48.75)
OD0: D9.2 X2.A2 | length 68.5
  Top Layer w0.25: D9.2 228.75,115 230,116.25 v1(237.5,116.25) ; v1(237.5,91.25) 266.25,91.25 X2.A2
  Bottom Layer w0.25: v1(237.5,91.25) v1(237.5,116.25)
OD1: D9.5 X2.A3 | length 58.5
  Top Layer w0.25: D9.5 227.5,107.5 228.75,108.75 v1(235,108.75) ; v1(235,93.75) 266.25,93.75 X2.A3
  Bottom Layer w0.25: v1(235,93.75) v1(235,108.75)
OD2: D9.6 X2.A4 | length 53.5
  Top Layer w0.25: D9.6 227.5,105 228.75,106.25 v1(238.75,106.25) ; v1(238.75,96.25) 266.25,96.25 X2.A4
  Bottom Layer w0.25: v1(238.75,96.25) v1(238.75,106.25)
OD3: D9.9 X2.A5 | length 43.5
  Top Layer w0.25: D9.9 228.308,97.5 229.558,98.75 266.25,98.75 X2.A5
OD4: D9.12 X2.A6 | length 39.3
  Top Layer w0.25: D9.12 v1(241.25,97.5) ; v1(241.25,101.25) 266.25,101.25 X2.A6
  Bottom Layer w0.25: v1(241.25,97.5) v1(241.25,101.25)
OD5: D9.15 X2.A7 | length 36
  Top Layer w0.25: D9.15 233.75,103.75 266.25,103.75 X2.A7
OD6: D9.16 X2.A8 | length 36
  Top Layer w0.25: D9.16 241.25,107.5 242.5,106.25 266.25,106.25 X2.A8
OD7: D9.19 X2.A9 | length 41.8
  Top Layer w0.25: D9.19 v1(241.25,115) ; v1(241.25,108.75) 266.25,108.75 X2.A9
  Bottom Layer w0.25: v1(241.25,108.75) v1(241.25,115)
RES#: D1.2 D1.3 D10.1 X1.A21 | length 177.3
  Top Layer w0.25: v1(206.25,135) D1.3 ; v1(207.5,55) 226.25,55 226.25,56.25 v1(241.25,56.25) v1(256.25,56.25) ; D10.1 v1(257.5,82.5)
  Bottom Layer w0.25: v1(206.25,135) 206.25,56.25 v1(207.5,55) ; D1.3 D1.2 ; X1.A21@241.25,45 v1(241.25,56.25) ; v1(256.25,56.25) 256.25,80 257.5,81.25 v1(257.5,82.5)
ROM#: D5.1 D5.10 D5.15 X1.B2 | length 199.8
  Top Layer w0.25: v1(172.5,47.5) 193.75,47.5 X1.B2@193.75,45 ; v1(172.5,142.5) D5.1 v1(227.5,142.5) ; v1(227.5,127.5) D5.10 ; v1(227.5,140) D5.15
  Bottom Layer w0.25: v1(172.5,47.5) v1(172.5,142.5) ; v1(227.5,127.5) 227.5,132.5 228.75,133.75 228.75,138.75 v1(227.5,140) v1(227.5,142.5)
RW: D2.3 D3.11 D4.1 D4.15 D5.11 D6.10 D7.4 | length 145.6
  Top Layer w0.25: D3.11 v1(201.25,65) ; v1(202.5,72.5) D7.4 213.75,72.5 215,73.75 220,73.75 220,75 D2.3 227.5,75 v1(228.75,76.25) v1(243.75,76.25) ; D4.1 215,112.5 D4.15 218.75,111.25 v1(228.75,111.25) ; v1(228.75,130) D5.11 ; v1(243.75,70) D6.10
  Bottom Layer w0.25: v1(201.25,65) 202.5,66.25 v1(202.5,72.5) ; v1(228.75,76.25) v1(228.75,111.25) v1(228.75,130) ; v1(243.75,70) v1(243.75,76.25)
STR#: D1.5 X1.B21 | length 193.7
  Top Layer w0.25: v1(171.25,55) 206.25,55 206.25,53.75 228.75,53.75 228.75,51.25 241.25,51.25 X1.B21@241.25,45 ; v1(171.25,130) D1.5
  Bottom Layer w0.25: v1(171.25,55) v1(171.25,130)
УП1: D10.2 X2.B6 | length 28.5
  Bottom Layer w0.25: D10.2 256.25,81.25 256.25,85 257.5,85 257.5,98.75 263.75,98.75 X2.B6
УП1#: D10.3 X2.B2 | length 19.6
  Top Layer w0.25: D10.3 258.75,77.5 v1(260,78.75)
  Bottom Layer w0.25: v1(260,78.75) 261.25,80 261.25,83.75 262.5,85 263.75,85 263.75,88.75 X2.B2
УП2: D10.7 X2.B7 | length 46
  Bottom Layer w0.25: D10.7 253.75,68.75 253.75,86.25 256.25,86.25 256.25,101.25 263.75,101.25 X2.B7
УП2#: D10.6 X2.B3 | length 33.8
  Top Layer w0.25: D10.6 255.182,69.818 256.432,69.818 v1(258.75,67.5)
  Bottom Layer w0.25: v1(258.75,67.5) 258.75,80 260,81.25 260,83.75 261.25,85 261.25,91.25 263.75,91.25 X2.B3
УП3: D10.10 X2.B8 | length 61
  Top Layer w0.25: v1(252.5,66.25) 261.25,66.25 D10.10
  Bottom Layer w0.25: v1(252.5,66.25) 252.5,87.5 255,87.5 255,103.75 263.75,103.75 X2.B8
УП3#: D10.11 X2.B4 | length 33.8
  Top Layer w0.25: v1(257.5,72.5) 260,72.5 D10.11
  Bottom Layer w0.25: v1(257.5,72.5) 257.5,80 258.75,81.25 258.75,83.75 260,85 260,93.75 263.75,93.75 X2.B4
УП4: D10.15 X2.B9 | length 53.5
  Top Layer w0.25: v1(251.25,78.75) 256.875,78.75 258.125,80 D10.15
  Bottom Layer w0.25: v1(251.25,78.75) 251.25,90 253.75,90 253.75,106.25 263.75,106.25 X2.B9
УП4#: D10.14 X2.B5 | length 31.8
  Top Layer w0.25: v1(258.75,86.25) 263.75,86.25 263.75,77.5 D10.14
  Bottom Layer w0.25: v1(258.75,86.25) 258.75,96.25 263.75,96.25 X2.B5
Ф1: D1.6 X1.A14 | length 163.3
  Top Layer w0.25: v1(177.5,81.25) 200,81.25 200,82.5 222.334,82.5 v1(222.5,82.666) ; v1(177.5,126.25) 200,126.25 200,127.5 D1.6
  Bottom Layer w0.25: v1(177.5,81.25) v1(177.5,126.25) ; v1(222.5,82.666) 222.5,82.5 223.75,81.25 X1.A14@223.75,45
pads on no net: D4.4 D4.6 D4.7 D4.11 D6.3 D6.11 X1.A1 X1.A2 X1.A12 X1.A13 X1.A16 X1.A17 X1.A18 X1.A19 X1.A20 X1.A22 X1.A23 X1.A26 X1.A27 X1.B1 X1.B15 X1.B16 X1.B17 X1.B18 X1.B20 X1.B22 X1.B23 X1.B26 X1.B27

## Polygon pours and split planes (outlines as drawn)
GND on Bottom Layer "Bottom Layer-No Net 2" (solid, pour order 1): 157.5,43.75 157.5,157.5 180,157.5 180,153.75 177.5,153.75 161.25,137.5 161.25,43.75
GND on Bottom Layer "Bottom Layer-No Net 3" (solid, pour order 0): 186.25,36.25 157.5,36.25 157.5,45 186.25,45
GND on Bottom Layer "Bottom Layer-No Net" (solid, pour order 3): 265,147.5 265,113.75 267.5,113.75 267.5,110 268.75,110 268.75,83.75 266.25,83.75 266.25,51.25 258.125,51.25 258.125,45 271.25,45 271.25,147.5
GND on Bottom Layer "Bottom Layer-No Net 1" (solid, pour order 2): 178.75,157.5 261.25,157.5 261.25,151.25 265,147.5 266.25,147.5 266.25,145 265,145 263.75,146.25 253.75,146.25 250,150 236.25,150 232.5,153.75 178.75,153.75
+5В on Top Layer "Bottom Layer-No Net 1" (solid, pour order 5): 178.75,157.5 261.25,157.5 261.25,151.25 265,147.5 266.25,147.5 266.25,145 262.575,143.825 260.15,146.25 248.75,146.25 245,150 232.5,150 232.5,153.75 178.75,153.75
+5В on Top Layer "Bottom Layer-No Net 2" (solid, pour order 4): 157.5,88.125 157.5,157.5 180,157.5 180,153.75 177.5,153.75 161.25,137.5 161.25,85.625
no net on Top Overlay (solid): 183.5,152.625 186,152.625 186,145.625 188.5,145.625 188.5,152.625 191,152.625 191,155.125 183.5,155.125
no net on Top Overlay (solid): 173.5,145.625 173.5,150.125 178.5,155.125 182.5,155.125 182.5,145.625 180.5,145.625 180.5,147.625 178,147.625 178,150.125 180,150.125 180,152.125
no net on Top Overlay (solid): 170,155.125 175,155.125 175,152.625 172.5,152.625 172.5,145.625 170,145.625
no net on Top Overlay (solid): 160,150.125 160,145.625 166.5,152.125 166.5,150.125 164.5,150.125 164.5,147.625 167,147.625 167,145.625 169,145.625 169,155.125 165,155.125

## Keep-outs
Keep-Out Layer:
  lines w0.1: 33.15,34.35 33.875,33.625 189.675,33.625 189.7,33.6 189.7,18.9 190.8,17.8 264.1,17.8 265.2,18.9 265.2,33.625 268.238,33.625 272.387,33.625 272.625,33.625 273.15,34.15 273.15,44.875 273.15,157.75 272.4,158.5 34.2,158.5 33.15,157.45 33.15,34.35

## Other copper
Top Layer:
  rectangle net +5В: 258.125,45 271.25,51.25
  region net +5В: 271.25,47.5 271.25,147.5 264.375,147.5 262.5,149.375 262.5,113.75 267.5,113.75 268.75,112.5 268.75,88.75 267.5,87.5 265,87.5 265,47.5
Bottom Layer:
  text "emuverse.ru / agatcomp.ru" at 182.5,38.125 h2

## Silkscreen, mask and mechanical layers (free items; w line width, h text height)
Top Overlay:
  lines w0.1: 19.375,10 289.375,10 289.375,170.625 19.375,170.625 19.375,10
  text "Контроллер принтера" at 160,137.81 h5
  text "Фг3.089.174" at 160,132.5 h5
  text "Реплика 2023" at 160,126.882 h5
  text "v0.1" at 160.002,121.28 h5

## Text inside footprints (layer, text, board x,y; h text height)
X1: Top Overlay "B1" at 186.45,34.684 h2; Top Overlay "B30" at 265.85,34.684 h2; Bottom Overlay "A1" at 189.142,34.684 h2; Bottom Overlay "A30" at 271.242,34.584 h2